# Altium PCB oiler_pcb.PcbDoc
Units mm, origin at the board's own origin, x right, y up, seen from the top; angles counter-clockwise.
Board outline 50 x 50 mm, 2 copper layers (Top Layer, Bottom Layer); 17 components, 13 nets, 66 pads, 4 vias.
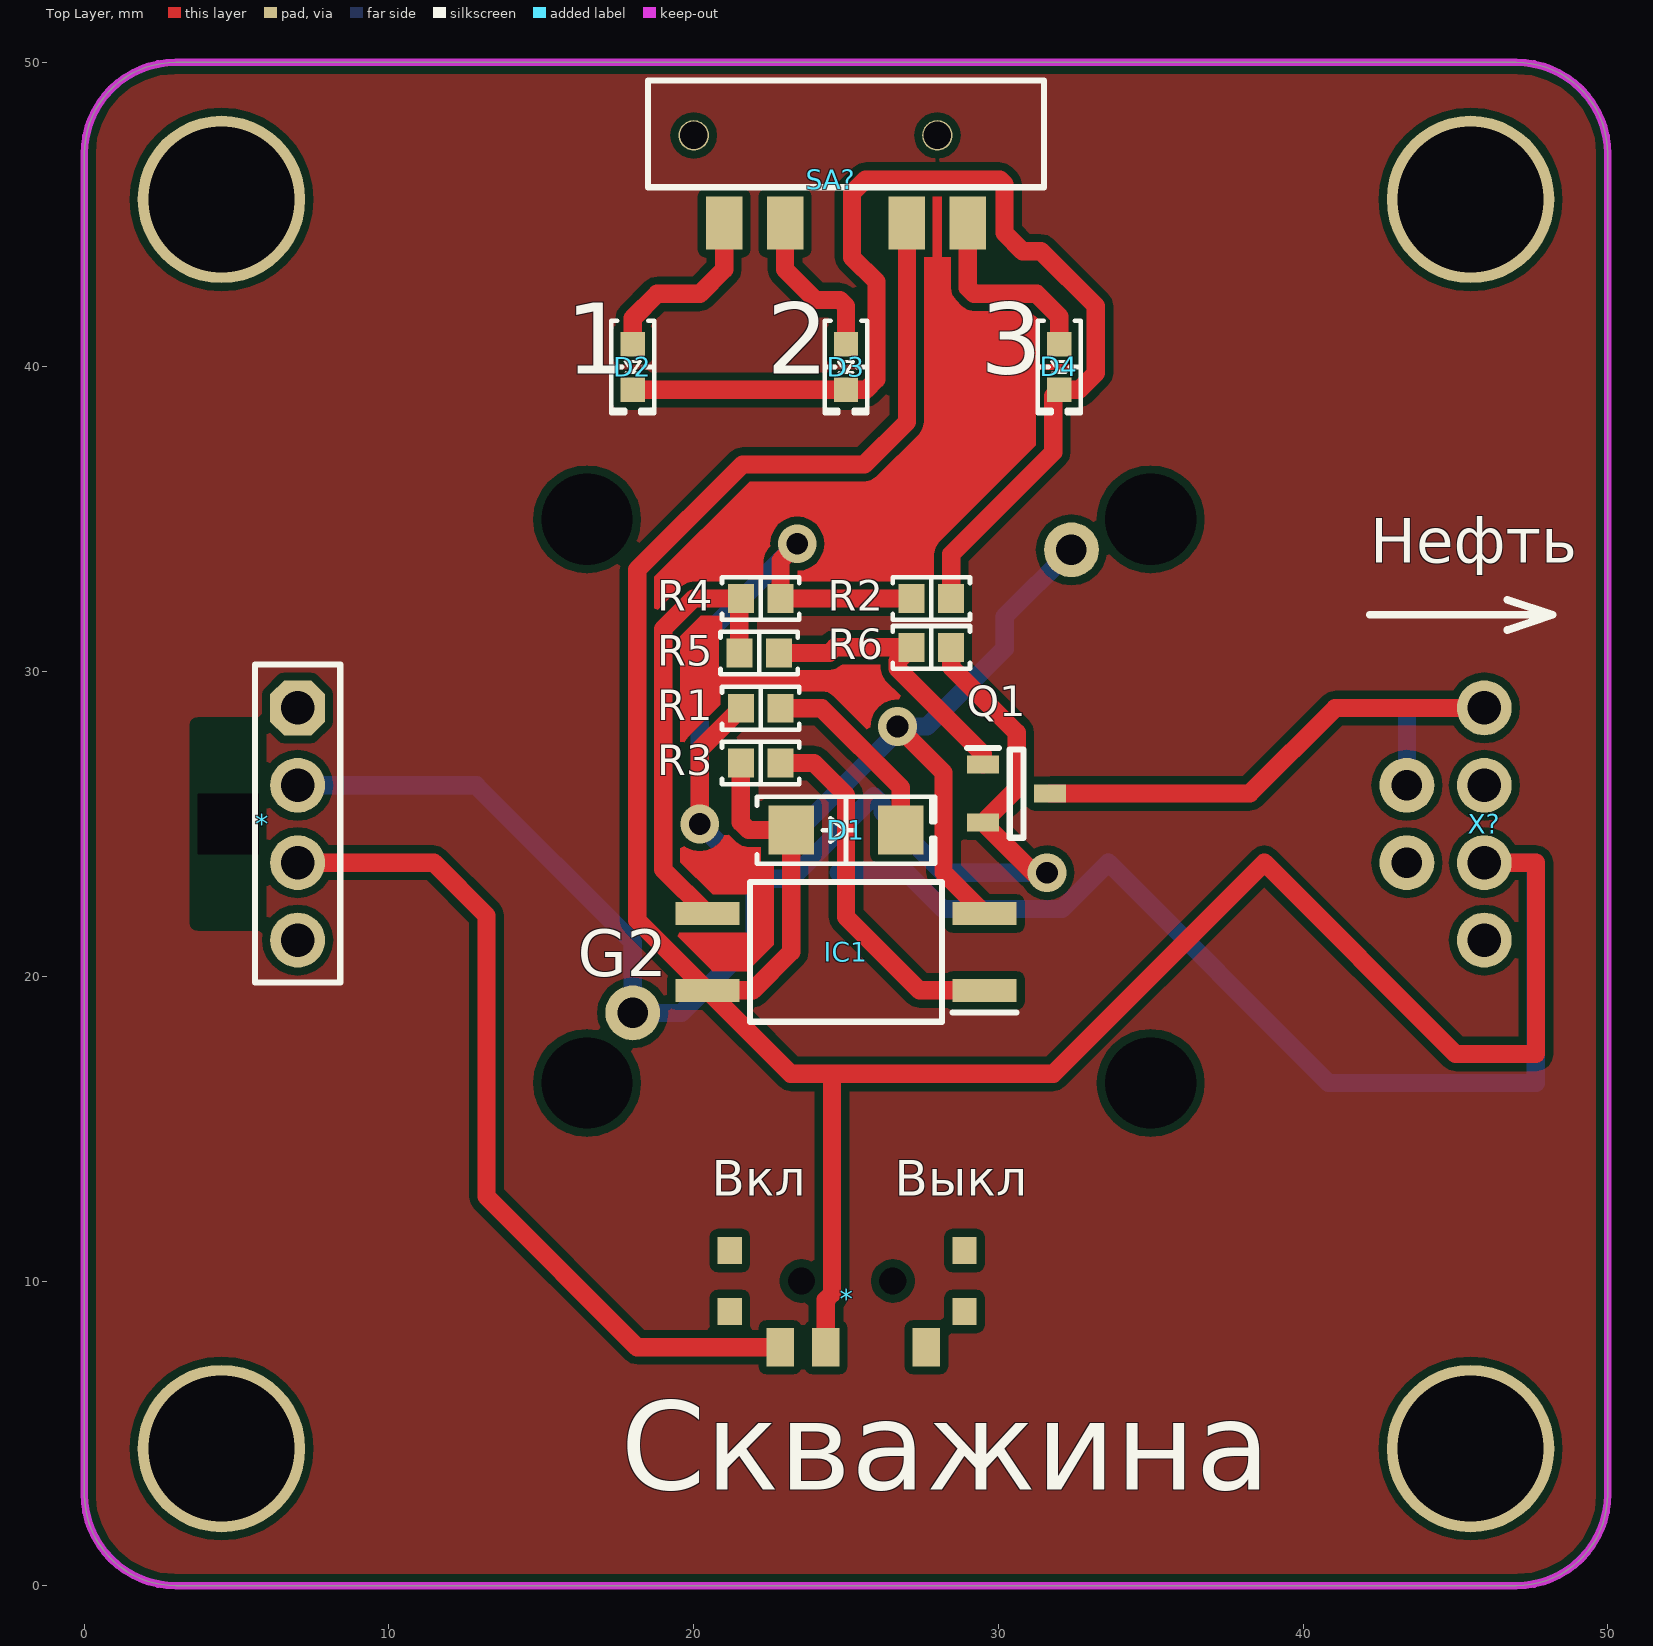
[diagram p0: Top Layer view]
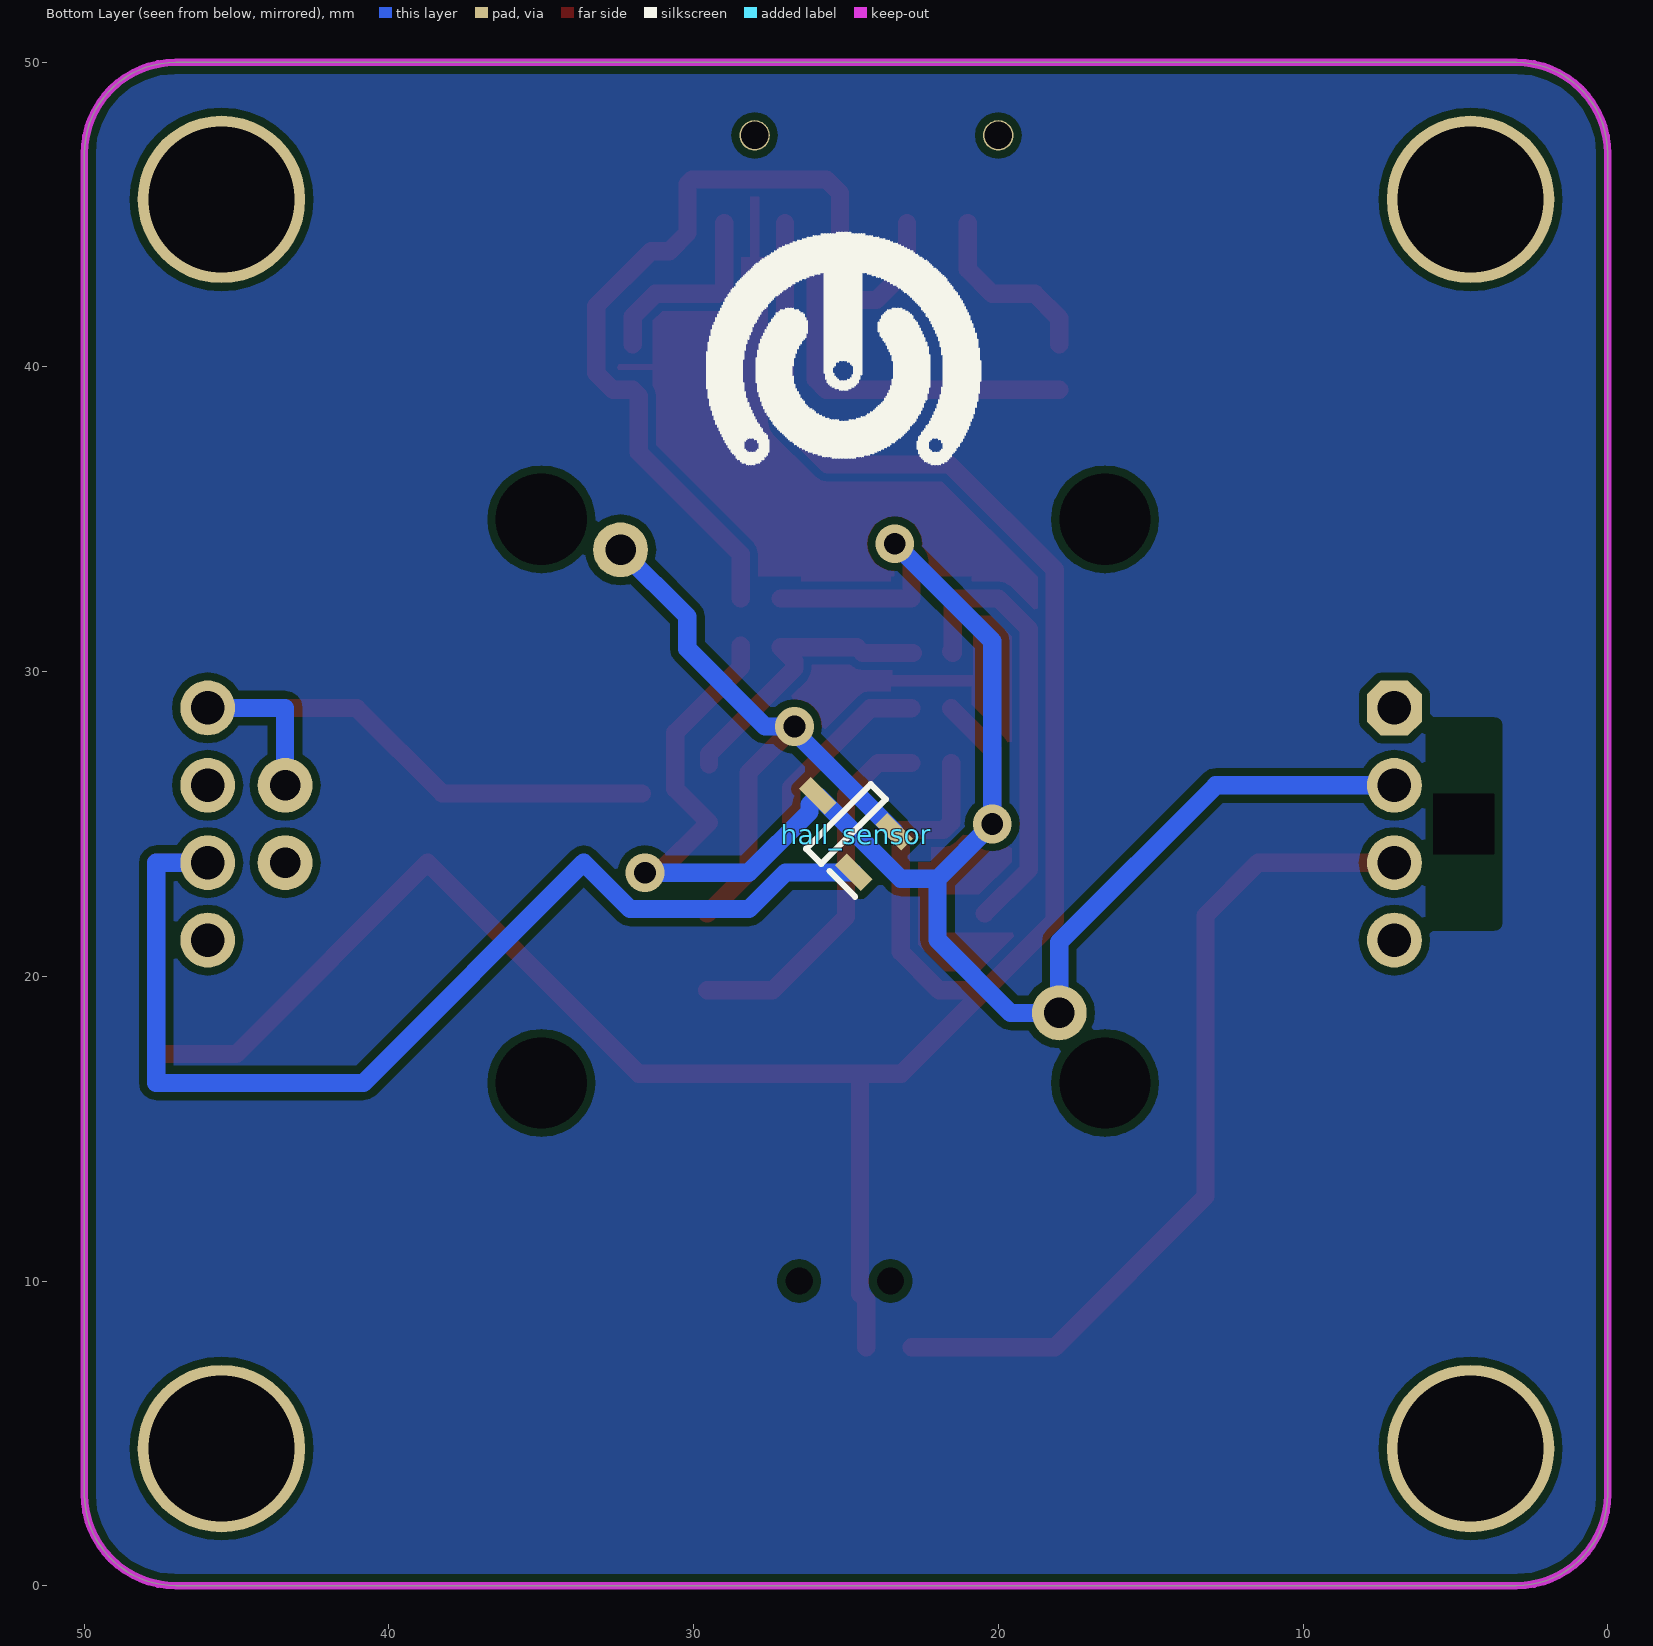
[diagram p1: Bottom Layer view, seen from below]

## Layer stack, top to bottom
Top Solder: solder mask 0.0102, Solder Resist, Dk 3.5
Top Layer: signal copper 0.0356
Dielectric 1: dielectric 0.32, FR-4, Dk 4.8
Bottom Layer: signal copper 0.0356
Bottom Solder: solder mask 0.0102, Solder Resist, Dk 3.5

## Board outline
0,3 ccw(c3,3) 3,0 47,0 ccw(c47,3) 50,3 50,47 ccw(c47,47) 47,50 3,50 ccw(c3,47) 0,47

## Design rules (kind name [scope] priority, off if disabled: settings)
Clearance [All] p1: gap=0.254 ignorepadtopadclearanceinfootprint=FALSE except(0: Arc-Hole Track-Hole SMDPad-Hole THPad-Hole Via-Hole Fill-Hole Poly-Hole Region-Hole Text-Hole)
PolygonConnect [All] p1: connectstyle=Relief reliefconductorwidth=0.254 reliefentries=4 polygonreliefangle="90 Angle" airgapwidth=0.254
RoutingVias [All] p1: holewidth=0.711 width=1.27 viastyle="Through Hole" minholewidth=0.711 minwidth=1.27 maxholewidth=0.711 maxwidth=1.27
SolderMaskExpansion [All] p1: expansion=0.102
Width [All] p1: maxlimit=2 minlimit=0.254 preferedwidth=0.6
30 further rules are at their usual default settings.

## Components (designator, comment, footprint, x,y, rotation, side; value= is the part's Value field where it differs from the comment)
* "switcher" switcher 25,10 r90 top
* "PBS 4" "PBS-4 CUT" 7,25 r270 top
D1 "Red" "LED 1206_3216 RED" 25,24.8 r0 top
D2 "Green" "LED 0603_1608 GREEN" 18,40 r270 top
D3 "Green" "LED 0603_1608 GREEN" 25,40 r270 top
D4 "Green" "LED 0603_1608 GREEN" 32,40 r270 top
hall_sensor "TLE4964-5K" SOT95P285X120-3N 25,25 r45 bottom
IC1 "SFH619A-X007T" SOP252P1016X430-4N 25,20.8 r180 top
Q1 "2N7002P,215" SOT95P230X110-3N 30.6,26 r0 top
R1 "10 kOhms" "RES 0603_1608" 22.2,28.8 r0 top
R2 "10 kOhms" "RES 0603_1608" 27.8,32.4 r0 top
R3 "10 kOhms" "RES 0603_1608" 22.2,27 r180 top
R4 "10 kOhms" "RES 0603_1608" 22.2,32.4 r0 top
R5 "10 kOhms" "RES 0603_1608" 22.15,30.61 r0 top
R6 "10 kOhms" "RES 0603_1608" 27.8,30.8 r180 top
SA? "Switcher" SMD 25,47.6 r180 top
X? "PLS 4" "pls-4 right angle" 45.95,25 r270 top

## Footprints (in the part's own frame and the unit in brackets; to place one, negate y for a bottom-side part, rotate by r counter-clockwise, add the part's x,y. Pads: shape width x height; smd on the part's side, far side on the other; paste and mask are expansions set on the pad)
"LED 0603_1608 GREEN" [mm] "Chip Diode, 2-Leads, Body 1.60x0.80mm, IPC Medium Density"
  rect 0.8x0.8 smd: 1(-0.75,0) 2(0.75,0)
  silkscreen extent -1.52,-0.7 1.52,0.7, body extent -0.8,-0.4 0.8,0.4, height 0.53
"LED 1206_3216 RED" [mm] "Chip Diode, 2-Leads, Body 3.13x1.55mm, IPC Medium Density"
  rect 1.5x1.6 smd: 1(-1.8,0) 2(1.8,0)
  silkscreen extent -2.92,-1.1 2.92,1.1, body extent -1.6,-0.8 1.6,0.8, height 0.9
"PBS-4 CUT" [mm]
  oct 1.8x1.8 hole 1.1: 1(-3.81,0)
  round 1.8 hole 1.1: 2(-1.27,0) 3(1.27,0) 4(3.81,0)
  rrect50% 0x0 hole 2 square: ""(0,-2.28)
  silkscreen extent -5.23,-1.4 5.2,1.4, body extent -5.08,-1.27 5.08,1.27, height 8.4
"pls-4 right angle" [mm]
  round 1.8 hole 1.1: 1(-3.81,0) 2(-1.27,0) 3(1.27,0) 4(3.81,0)
  body extent -5.04,-0.32 5.14,10.04, height 2.57
"RES 0603_1608" [mm] "Chip Resistor, 2-Leads, Body 1.60x0.80mm, IPC Medium Density"
  rect 0.85x0.95 smd: 1(-0.65,0) 2(0.65,0)
  silkscreen extent -1.27,-0.7 1.27,0.7, body extent -0.8,-0.4 0.8,0.4, height 0.45
SMD [mm]
  rect 1.2x1.75 smd: 1(-4,2.875) 2(-2,2.875) 3(2,2.875) 4(4,2.875)
  round 1 hole 0.9: ""(-3,0) ""(5,0)
  silkscreen extent -6.5,-1.8 6.5,1.7
SOP252P1016X430-4N [mm]
  rect 2.1x0.75 smd: 1(-4.55,1.26) 2(-4.55,-1.26) 3(4.55,-1.26) 4(4.55,1.26)
  silkscreen extent -5.6,-2.29 3.15,2.29, body extent -5.08,-2.29 5.08,2.29, height 4.3
SOT95P230X110-3N [mm]
  rect 1.05x0.6 smd: 1(-1.1,0.95) 2(-1.1,-0.95) 3(1.1,0)
  silkscreen extent -1.63,-1.45 0.23,1.5, body extent -1.15,-1.45 1.15,1.45, height 1.1
SOT95P285X120-3N [mm]
  rect 1.2x0.55 smd: 1(-1.3,0.95) 2(-1.3,-0.95) 3(1.3,0)
  silkscreen extent -1.9,-1.5 0.35,1.5, body extent -1.43,-1.5 1.43,1.5, height 1.2
switcher [mm] "SS-3292S-L1"
  rect 1.25x0.9 smd: 1(-2.175,-2.639) 2(-2.175,0.661) 3(-2.175,2.161)
  rect 0.9x0.8 smd: ""(-1,3.811) ""(-1,-3.889) ""(1,3.811) ""(1,-3.889)
  round 0 hole 0.9 unplated: ""(0,1.461) ""(0,-1.539)
  body extent -1.52,-4.38 1.52,4.38, height 6

## Part data
D1: library part SML-LX1206SIC-TR, "LED RED CLEAR 1206 SMD", Current - Test=20mA, Device Package="1206 (3216 Metric)", Lens Color=Colorless, Manufacturer="Lumex Opto/Components Inc.", Millicandela Rating=54mcd, Supplier Device Package=1206, Supplier Part Number 1=67-1695-1-ND, Voltage - Forward (Vf) (Typ)=2V, Color=Red, ComponentLink1Description=Datasheet, ComponentLink1URL=https://www.lumex.com/content/files/ProductAttachment/SML-LX1206SIC-TR.pdf, ComponentLink2Description="DigiKey Link", ComponentLink2URL=http://digikey.com/product-detail/en/lumex-opto-components-inc/SML-LX1206SIC-TR/67-1695-1-ND/467580, Configuration=Standard, Height (Max)=1.10mm, LastUpdated="21.01.2020 3:14:28", Lens Size="2.00mm x 1.50mm", Lens Style="Rectangle with Flat Top", Lens Transparency=Clear, Lifecycle Status=Active, Minimum Order=1, Mounting Type="Surface Mount", Package / Case="1206 (3216 Metric)", Packaging=TapeAndReel, PartId=205, Part Number=SML-LX1206SIC-TR, Part Status=Active, Price=0.11, Series=-, Size / Dimension="3.20mm L x 1.60mm W", Supplier 1=DigiKey, Viewing Angle=130°, Wavelength - Peak=632nm
D2 D3 D4: library part LSM0603453V, "LED SM 0603 3V -/1000/-MCD GREEN", Current - Test=20mA, Device Package="0603 (1608 Metric)", Lens Color=Colorless, Manufacturer="Visual Communications Company - VCC", Millicandela Rating=63mcd, Supplier Device Package="Chip LED", Supplier Part Number 1=LSM0603453VCT-ND, Voltage - Forward (Vf) (Typ)=2V, Color=Green, ComponentLink1Description=Datasheet, ComponentLink1URL=https://vcclite.com/wp-content/uploads/wpallimport/files/files/LSM0603453V.pdf, ComponentLink2Description="DigiKey Link", ComponentLink2URL=http://digikey.com/product-detail/en/visual-communications-company-vcc/LSM0603453V/LSM0603453VCT-ND/9486729, Configuration=Standard, Height (Max)=0.65mm, LastUpdated="21.01.2020 3:12:15", Lens Size="1.20mm x 0.80mm", Lens Style="Rectangle with Flat Top", Lens Transparency=Clear, Lifecycle Status=Active, Minimum Order=1, Mounting Type="Surface Mount", Package / Case="0603 (1608 Metric)", Packaging=TapeAndReel, PartId=579, Part Number=LSM0603453V, Part Status=Active, Price=0.06, Series=LSM0603, Size / Dimension="1.60mm L x 0.80mm W", Supplier 1=DigiKey, Viewing Angle=120°, Wavelength - Dominant=572nm, Wavelength - Peak=571nm
hall_sensor: library part TLE4964-3K, "Switch", Manufacturer_Name=Infineon, Mouser Part Number=726-TLE4964-3K, Datasheet Link=http://uk.rs-online.com/web/p/products/1107461, Height=1.2mm, Manufacturer_Part_Number=TLE4964-3K, Mouser Price/Stock=https://www.mouser.com/Search/Refine.aspx?Keyword=726-TLE4964-3K
IC1: "Integrated Circuit", Manufacturer_Name=Vishay, Mouser Part Number=782-SFH619A-X007T, RS Part Number=1807876, Datasheet Link=http://www.vishay.com/docs/83674/sfh619a.pdf, Height=4.3mm, Manufacturer_Part_Number=SFH619A-X007T, Mouser Price/Stock=https://www.mouser.com/Search/Refine.aspx?Keyword=782-SFH619A-X007T, RS Price/Stock=http://uk.rs-online.com/web/p/products/1807876
Q1: "Transistor", Manufacturer_Name=Nexperia, Mouser Part Number=771-2N7002P-215, RS Part Number=7920765P, Datasheet Link=http://www.farnell.com/datasheets/1936237.pdf, Height=1.1mm, Manufacturer_Part_Number=2N7002P,215, Mouser Price/Stock=https://www.mouser.com/Search/Refine.aspx?Keyword=771-2N7002P-215, RS Price/Stock=http://uk.rs-online.com/web/p/products/7920765P
R1 R2 R3 R4 R5 R6: library part RNCS0603BKE10K0, "RES 10K OHM 0.1% 1/16W 0603", Device Package="0603 (1608 Metric)", Manufacturer="Stackpole Electronics Inc", Operating Temperature="-55°C ~ 155°C", Power (Watts)="0.063W, 1/16W", Ratings=AEC-Q200, Supplier Device Package=0603, Supplier Part Number 1=RNCS0603BKE10K0CT-ND, Temperature Coefficient=±25ppm/°C, Tolerance=±0.1%, ComponentLink1Description=Datasheet, ComponentLink1URL=https://www.seielect.com/catalog/sei-rncs_rnch.pdf, ComponentLink2Description="DigiKey Link", ComponentLink2URL=http://digikey.com/product-detail/en/stackpole-electronics-inc/RNCS0603BKE10K0/RNCS0603BKE10K0CT-ND/1800113, Composition="Thin Film", Features="Anti-Corrosive, Automotive AEC-Q200, Moisture Resistant", Height - Seated (Max)="0.022\" (0.55mm)", LastUpdated="21.01.2020 0:25:01", Lifecycle Status=Active, Minimum Order=1, Number of Terminations=2, Package / Case="0603 (1608 Metric)", Packaging=TapeAndReel, PartId=4838, Part Number=RNCS0603BKE10K0, Part Status=Active, Price=0.08, Resistance="10 kOhms", Series=RNCS, Size / Dimension="0.061\" L x 0.031\" W (1.55mm x 0.80mm)", Supplier 1=DigiKey

## Free pads (board coordinates)
  round 5.5 hole 4.8: 7(4.5,4.5) 7(4.5,45.5) 7(45.5,4.5) 7(45.5,45.5)
  round 1.524 hole 3: 8(16.5,16.5) 8(16.5,35) 8(35,16.5) 8(35,35)
  round 1.8 hole 1: 9(18,18.8) 9(32.4,34) ""(43.41,23.73) ""(43.41,26.27)

## Via types
v1: diameter 1.27, hole 0.711, Top Layer to Bottom Layer, 4 vias

## Nets (pads, with @x,y where several pads share a name; then routed paths per layer and width w, separated by ;. In a path a pad name is that pad's centre, name@x,y a point inside that pad or via, vN(x,y) a via of type N, cw(c..) or ccw(c..) an arc to the next point about the centre after c; other vN are vias at no path point)
Gerkon: hall_sensor.2 IC1.2 pad.9@32.4,34 | length 20.9
  Top Layer w0.6: v1(26.693,28.2) 28.2,26.693 28.2,23.41 IC1.2
  Bottom Layer w0.6: hall_sensor.2 26.693,28.037 v1(26.693,28.2) 27.656,28.2 30.209,30.753 30.209,31.809 pad.9@32.4,34
GND: *.2@7,26.27 hall_sensor.3 pad.9@18,18.8 Q1.2 R1.1 R2.1 R4.2 R6.1 | length 68.1
  Top Layer w0.6: v1(20.2,25) 20.2,27.45 R1.1 ; v1(23.4,34.2) 22.85,33.65 R4.2 R2.1 ; R6.1@28.45,30.85 R6.1 28.45,30.15 30.6,28 30.6,26.15 Q1.2 31.15,23.4 v1(31.6,23.4)
  Bottom Layer w0.6: *.2@7,26.27 12.86,26.27 18,21.13 18,18.8 19.6,18.8 22,21.2 22,22.2 22,23.2 ; v1(23.4,34.2) 20.2,31 v1(20.2,25) 22,23.2 ; v1(31.6,23.4) 28.2,23.4 26.2,25.4 26.2,25.638 hall_sensor.3 23.2,23.2 22,23.2
Net*_3: *.3 | length 27.8
  Top Layer w0.6: *.3@7,23.73 11.47,23.73 13.2,22 13.2,12.771 18.146,7.825 *.3@22.839,7.825
NetD1_2: D1.2 R1.2 | length 6.4
  Top Layer w0.6: R1.2 24.2,28.8 26.8,26.2 D1.2
NetD2_1: D2.1 SA?.4 | length 6
  Top Layer w0.6: D2.1 18,41.6 18.8,42.4 20.2,42.4 21,43.2 SA?.4
NetD2_2: D2.2 D3.2 D4.2 R2.2 | length 37.4
  Top Layer w0.6: D2.2 D3.2 25.65,39.25 26,39.6 26,42.8 25.2,43.6 25.2,45.708 25.646,46.154 30.046,46.154 30.2,46 30.2,44.4 30.8,43.8 31.4,43.8 33.2,42 33.2,39.8 32.65,39.25 D4.2 31.8,39.05 31.8,37.2 28.45,33.85 R2.2
NetD3_1: D3.1 SA?.3 | length 5.3
  Top Layer w0.6: SA?.3 23,43.2 24,42.2 24.8,42.2 25,42 D3.1
NetD4_1: D4.1 SA?.1 | length 6.4
  Top Layer w0.6: SA?.1 29,42.6 29.2,42.4 31.26,42.4 32,41.66 D4.1
NetIC1_1: IC1.1 R3.1 | length 12.1
  Top Layer w0.6: R3.1 23.95,27 25,25.95 25,21.95 27.41,19.54 IC1.1
NetIC1_3: IC1.3 R4.1 R5.1 | length 14.8
  Top Layer w0.6: IC1.3 19,23.51 19,31.4 20,32.4 R4.1 21.5,32.35 R5.1 R5.1@21.55,30.66
NetQ1_1: Q1.1 R5.2 R6.2 | length 9.6
  Top Layer w0.6: R5.2 24.449,30.61 24.639,30.8 R6.2 26.693,30.343 26.693,30.107 29.5,27.3 Q1.1
NetQ1_3: pad.@43.41,26.27 Q1.3 X?.1 | length 20.5
  Top Layer w0.6: Q1.3 38.25,26 41.06,28.81 X?.1
  Bottom Layer w0.6: pad.@43.41,26.27 43.41,28.81 X?.1
VCC: *.2@24.339,7.825 D1.1 hall_sensor.1 IC1.4 R3.2 SA?.2 X?.3 | length 130
  Top Layer w0.6: R3.2 21.55,25.05 21.8,24.8 D1.1 23.2,20.8 21.94,19.54 IC1.4 ; *.2@24.339,7.825 24.339,9.38 24.543,9.584 24.543,16.657 24.4,16.8 ; SA?.2 27,38.2 25.6,36.8 21.6,36.8 18.146,33.346 18.146,21.844 IC1.4 ; X?.3 47.649,23.73 47.649,17.449 45.011,17.449 38.73,23.73 31.8,16.8 24.4,16.8 ; IC1.4 23.19,16.8 24.4,16.8
  Bottom Layer w0.6: hall_sensor.1 26.983,23.409 28.181,22.211 32.092,22.211 33.612,23.73 40.842,16.5 47.64,16.5 47.64,23.73 X?.3
pads on no net: *. *.1 *.4 SA?. X?.2 X?.4

## Polygon pours and split planes (outlines as drawn)
no net on Top Layer "Top Layer-No Net" (solid, pour order 0): 0,3 ccw(c3,3) 3,0 47,0 ccw(c47,3) 50,3 50,47 ccw(c47,47) 47,50 3,50 ccw(c3,47) 0,47
no net on Bottom Layer "Top Layer-No Net1" (solid, pour order 1): 0,3 ccw(c3,3) 3,0 47,0 ccw(c47,3) 50,3 50,47 ccw(c47,47) 47,50 3,50 ccw(c3,47) 0,47

## Keep-outs
Keep-Out Layer:
  the board outline again, w0.254

## Other copper
Top Layer:
  region: 20.871,31.671 20.935,31.671 20.935,31.339 20.821,31.339 20.821,29.881 23.479,29.881 23.479,30.045 24.449,30.045 24.665,30.088 24.848,30.211 24.873,30.235 26.128,30.235 26.128,30.107 26.171,29.891 26.294,29.708 26.789,29.212 26.73,29.092 26.693,29.097 26.461,29.066 26.245,28.977 26.059,28.834 25.916,28.648 25.827,28.432 25.796,28.2 25.8,28.168 25.687,28.112 24.599,29.199 24.416,29.322 24.2,29.365 23.529,29.365 23.529,29.529 20.871,29.529 20.871,28.92 19.801,27.849 19.692,27.687 19.6,27.695 19.565,27.708 19.565,31.166 20.234,31.835 20.871,31.835
  region: 21.401,24.401 21.584,24.278 21.8,24.235 22.196,24.235 22.196,23.746 22.635,23.746 22.635,21.034 21.845,20.244 21.754,20.169 20.62,20.169 19.475,21.314 19.524,21.431 21.754,21.431 21.754,22.689 20.62,22.689 19.565,23.744 19.565,24.207 19.692,24.269 19.752,24.223 19.968,24.134 20.2,24.103 20.432,24.134 20.648,24.223 20.834,24.366 20.977,24.552 21.01,24.632 21.151,24.651
  region: 28.146,43.596 28.435,43.596 28.435,42.6 28.478,42.384 28.601,42.201 28.801,42.001 28.984,41.878 29.2,41.835 31.026,41.835 31.335,41.526 31.346,41.404 31.346,40.096 32.464,40.096 32.521,39.97 32.469,39.904 31.346,39.904 31.346,39.368 31.278,39.266 31.235,39.05 31.235,37.434 28.051,34.249 27.928,34.066 27.885,33.85 27.885,33.129 26.471,33.129 26.471,32.965 23.529,32.965 23.529,33.129 23.415,33.129 23.415,33.305 23.632,33.334 23.848,33.423 24.034,33.566 24.177,33.752 24.266,33.968 24.297,34.2 24.266,34.432 24.177,34.648 24.034,34.834 23.848,34.977 23.632,35.066 23.4,35.097 23.168,35.066 22.952,34.977 22.766,34.834 22.623,34.648 22.534,34.432 22.503,34.2 22.515,34.114 22.451,34.049 22.328,33.866 22.285,33.65 22.285,33.129 20.871,33.129 20.871,32.965 20,32.965 19.784,32.922 19.601,32.799 18.828,32.027 18.711,32.076 18.711,33.112 21.834,36.235 25.6,36.235 25.816,36.278 25.999,36.401 27.399,37.801 27.522,37.984 27.565,38.2 27.565,43.596 27.854,43.596 27.854,45.589 28.146,45.589

## Silkscreen, mask and mechanical layers (free items; w line width, h text height)
Top Overlay:
  lines w0.254: 42.2,31.864 48.2,31.864 ; 46.7,31.364 48.2,31.864 ; 46.7,32.364 48.2,31.864
  text "1" at 15.8,39 h4
  text "2" at 22.4,39 h4
  text "3" at 29.4,39 h4
  text "Нефть" at 42.2,33.1 h2.5
  text "G2" at 16.2,20 h1.52
  text "Вкл" at 20.6,12.4 h2
  text "Выкл" at 26.6,12.4 h2
  text "Скважина" at 17.6,2.2 h5
Bottom Overlay:
  drawing of 376 lines, arcs and shapes, not listed